# EAGLE board HW2_circuit (EAGLE 8.1.0)
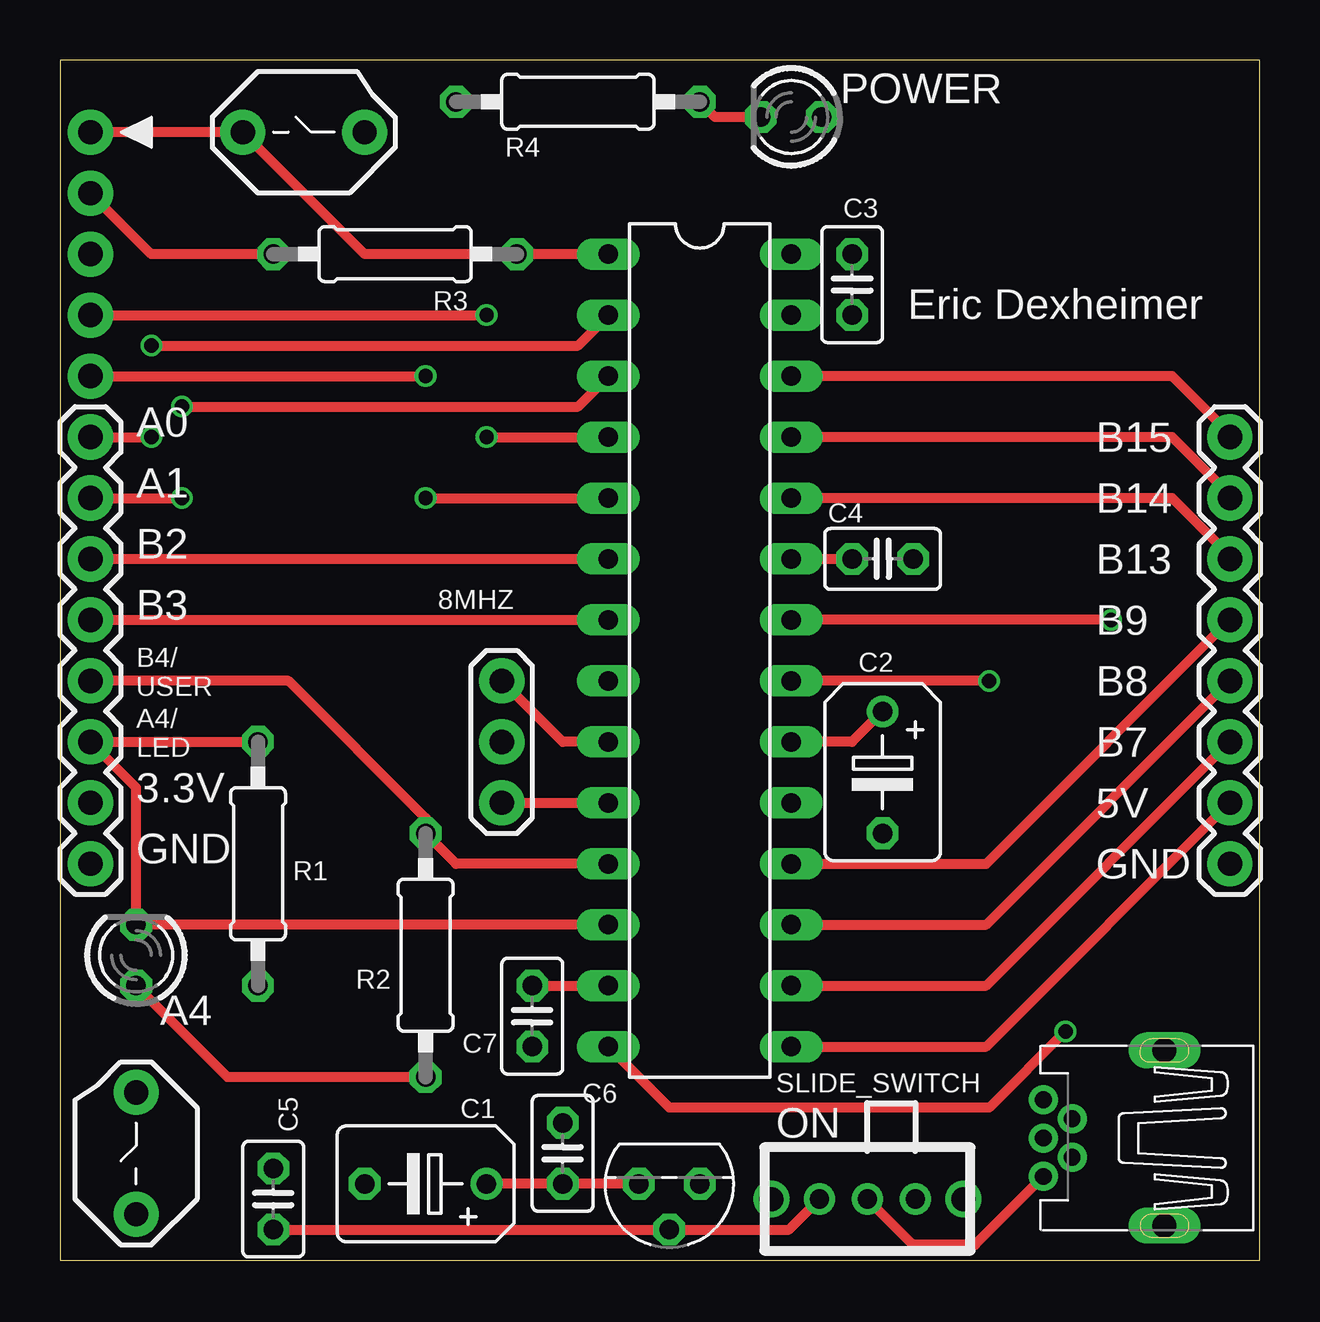
[diagram p0: board, top side]
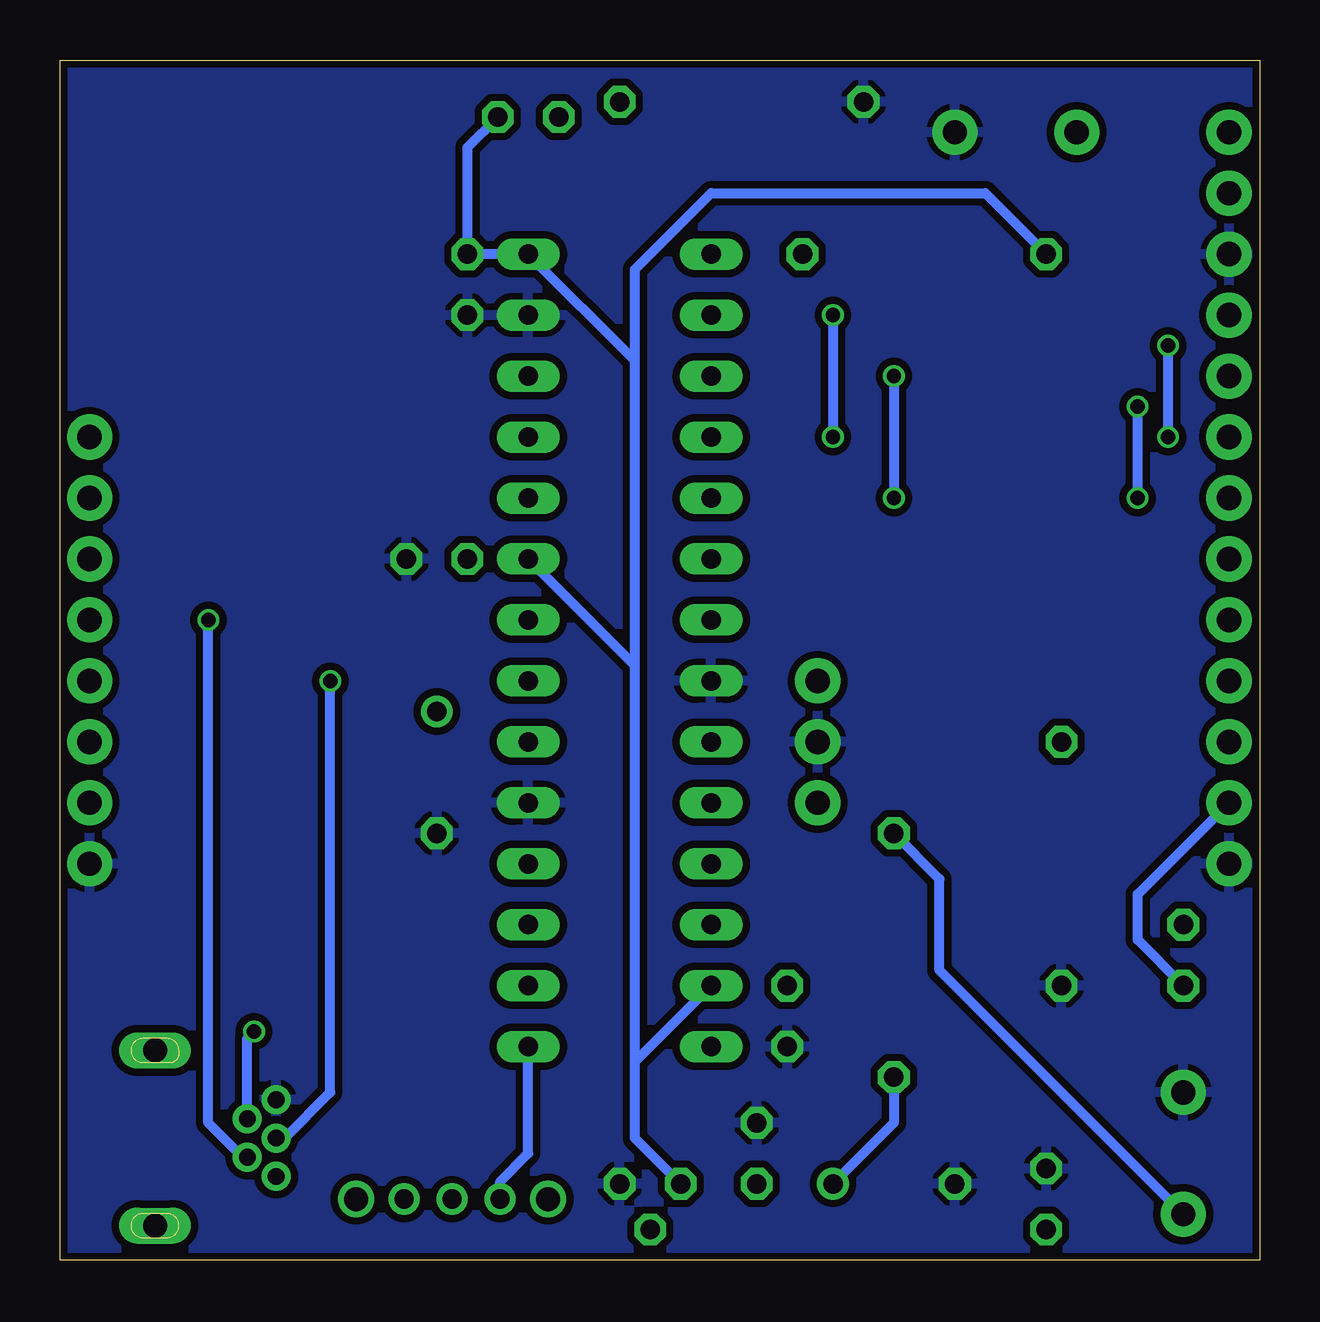
[diagram p1: board, bottom side, seen from below]

Size 50 x 50 mm. Coordinates in mm from the lower left corner, seen from the top.
Outline: 0,0 50,0 50,50 0,50 0,0
Copper layers (1*16): Top 0.035mm / dielectric 1.5mm / Bottom 0.035mm
Design rules "SeeedStudio_2layer_DRU_no_angle_20140221": minimum track width 6mil, minimum drill 12mil, track to track 6mil, track to pad 6mil, pad to pad 6mil, via to via 6mil, smd to smd 0mil, copper to edge 10mil, drill to drill 10mil, minimum pad ring 10mil, minimum via ring 6mil, stop-mask expansion 2mil, vias tented up to drill 100mil, thermal gap 10mil

## Footprints (pad centres in the part's own frame; a part is rotated, then mirrored left to right if it is on the bottom)
OSCILLATOR = drill 1.016 pad 1.88: 1 -2.54,0; 2 0,0; 3 2.54,0
LED3MM = drill 0.813 octagon: A -1.27,0; K 1.27,0
B45181B = drill 0.813: + -2.54,0 | drill 0.813 octagon: - 2.54,0
C025-025X050 = drill 0.813 octagon: 1 -1.27,0; 2 1.27,0
1X08 = drill 1.016 pad 1.88: 1 0,0; 2 2.54,0; 3 5.08,0; 4 7.62,0; 5 10.16,0; 6 12.7,0; 7 15.24,0; 8 17.78,0
SLIDE_SWITCH = drill 0.8: 2 2,0; 3 0,0; 4 -2,0 | drill 1: P$1 4,0; P$2 -4,0
0207/10 = drill 0.813 octagon: 1 -5.08,0; 2 5.08,0
DIL28-3 = drill 0.813 long: 1 -16.51,-3.81; 2 -13.97,-3.81; 3 -11.43,-3.81; 4 -8.89,-3.81; 5 -6.35,-3.81; 6 -3.81,-3.81; 7 -1.27,-3.81; 8 1.27,-3.81; 9 3.81,-3.81; 10 6.35,-3.81; 11 8.89,-3.81; 12 11.43,-3.81; 13 13.97,-3.81; 14 16.51,-3.81; 15 16.51,3.81; 16 13.97,3.81; 17 11.43,3.81; 18 8.89,3.81; 19 6.35,3.81; 20 3.81,3.81; 21 1.27,3.81; 22 -1.27,3.81; 23 -3.81,3.81; 24 -6.35,3.81; 25 -8.89,3.81; 26 -11.43,3.81; 27 -13.97,3.81; 28 -16.51,3.81
TO92 = drill 0.813 octagon: 1 -1.27,0; 2 0,1.905; 3 1.27,0
BUTTON = drill 1.016 pad 1.88: 1 -2.54,0; 3 2.54,0
PICKIT32 = drill 1.016 pad 1.88: 1 -5.08,0; 2 -2.54,0; 3 0,0; 4 2.54,0; 5 5.08,0
32005-601 = drill 0.7 pad 1.016: 1 2.825,1.6; 2 1.625,0.8; 3 2.825,0; 4 1.625,-0.8; 5 2.825,-1.6 | drill 1 pad 1.422 long: M1 -2.225,3.65; M2 -2.225,-3.65

## Placement (x,y rotation side)
8MHZ  RESONATOR  [OSCILLATOR]  18.41,21.59 90 top
A4  A4/LED  [LED3MM]  3.17,12.7 90 top
C1  10 uF  [B45181B]  15.24,3.17 180 top
C2  10 uF  [B45181B]  34.29,20.32 270 top
C3  0.1 uF  [C025-025X050]  33.02,40.64 270 top
C4  0.1 uF  [C025-025X050]  34.29,29.21 0 top
C5  0.1 uF  [C025-025X050]  8.89,2.54 90 top
C6  0.1 uF  [C025-025X050]  20.95,4.45 90 top
C7  0.1 uF  [C025-025X050]  19.68,10.16 270 top
J2  LEFT  [1X08]  1.27,16.51 90 top
J3  RIGHT  [1X08]  48.77,16.51 90 top
ON  SLIDE_SWITCH  [SLIDE_SWITCH]  33.66,2.54 0 bottom
POWER  RED  [LED3MM]  30.48,47.62 180 top
R1  330  [0207/10]  8.26,16.51 90 top
R2  10k  [0207/10]  15.24,12.7 270 top
R3  10k  [0207/10]  13.97,41.91 180 top
R4  330  [0207/10]  21.59,48.26 0 top
U$1  PIC32  [DIL28-3]  26.67,25.4 270 top
U$4  MCP1702  [TO92]  25.4,3.17 180 top
U$5  USER  [BUTTON]  3.17,4.45 90 top
U$6  RESET  [BUTTON]  10.16,46.99 0 top
U$7  PICKIT3  [PICKIT32]  1.27,41.91 270 top
X1  MINI-USB_SHIELD5P2-32005-601  [32005-601]  43.81,5.08 180 top

## Library data of the parts
8MHZ A4 C1-C7 ON POWER R1-R4 U$1 U$4-U$7 = ME433
J2 J3 = ME433; PROD_ID: CONN-08438
X1 = ME433; OC_FARNELL: unknown; OC_NEWARK: unknown

## Nets
+3V3: A4.A C1.+ C3.1 C4.1 C6.1 C7.1 J2.2 POWER.A R2.2 R3.2 U$1.13 U$1.23 U$1.28 U$4.3 U$7.2
+5V: C5.1 J3.2 ON.2 U$1.15 U$4.2
A0: J2.8 U$1.2
A1: J2.7 U$1.3
A4/LED: A4.K J2.3 R1.2 U$1.12
B2: J2.6 U$1.6
B3: J2.5 U$1.7
B4/USER: J2.4 R2.1 U$1.11 U$5.1
B7: J3.3 U$1.16
B8: J3.4 U$1.17
B9: J3.5 U$1.18
B13: J3.6 U$1.24
B14: J3.7 U$1.25
B15: J3.8 U$1.26
D+: U$1.21 X1.3
D-: U$1.22 X1.2
GND: 8MHZ.2 C1.- C2.- C3.2 C4.2 C5.2 C6.2 C7.2 J2.1 J3.1 R1.1 R4.1 U$1.8 U$1.19 U$1.27 U$4.1 U$5.3 U$6.3 U$7.3 X1.5
MCLR: R3.1 U$1.1 U$6.1 U$7.1
N$1: C2.+ U$1.20
N$3: POWER.K R4.2
OSC1: 8MHZ.3 U$1.9
OSC2: 8MHZ.1 U$1.10
PGEC1: U$1.5 U$7.5
PGED1: U$1.4 U$7.4
USBID: U$1.14 X1.4
VBUS: ON.3 X1.1

## Tracks (layer width: path | path; a pad name or v marks a point on that pad's centre or on a via)
+3V3
  Top 0.406: U$4.3 C6.1 C1.+ | U$1.23 C4.1 | C7.1 U$1.13 | R2.2 6.99,7.62 A4.A | R3.2 3.81,41.91 U$7.2
  Bottom 0.406: U$4.3 26.04,5.08 26.04,8.26 | 26.04,8.26 U$1.13 | 26.04,8.26 26.04,24.77 | 26.04,24.77 U$1.23 | R2.2 15.24,5.71 C1.+ | A4.A 5.08,13.34 5.08,15.24 J2.2 | 26.04,24.77 26.04,37.47 | 26.04,37.47 U$1.28 C3.1 33.02,46.35 POWER.A | 26.04,37.47 26.04,41.27 22.86,44.45 11.43,44.45 R3.2
+5V
  Top 0.406: C5.1 U$4.2 30.39,1.27 ON.2 | U$1.15 38.61,8.89 J3.2
  Bottom 0.406: U$1.15 30.48,4.45 31.66,3.27 ON.2
A0  (via drill 0.6)
  Top 0.406: J2.8 v3.81,34.29 | v3.81,38.1 21.59,38.1 U$1.2
  Bottom 0.406: v3.81,34.29 v3.81,38.1
A1  (via drill 0.6)
  Top 0.406: J2.7 v5.08,31.75 | v5.08,35.56 21.59,35.56 U$1.3
  Bottom 0.406: v5.08,31.75 v5.08,35.56
A4/LED
  Top 0.406: U$1.12 A4.K 3.17,19.68 J2.3 R1.2
B2
  Top 0.406: J2.6 U$1.6
B3
  Top 0.406: J2.5 U$1.7
B4/USER
  Top 0.406: U$1.11 16.51,16.51 R2.1 15.24,18.41 9.53,24.13 J2.4
  Bottom 0.406: U$5.1 13.34,12.06 13.34,15.88 R2.1
B7
  Top 0.406: U$1.16 38.61,11.43 J3.3
B8
  Top 0.406: U$1.17 38.61,13.97 J3.4
B9
  Top 0.406: U$1.18 38.61,16.51 J3.5
B13
  Top 0.406: J3.6 48.77,29.34 46.35,31.75 U$1.24
B14
  Top 0.406: J3.7 48.77,31.88 46.35,34.29 U$1.25
B15
  Top 0.406: J3.8 48.77,34.42 46.35,36.83 U$1.26
D+  (via drill 0.6)
  Top 0.406: v38.73,24.13 U$1.21
  Bottom 0.406: X1.3 40.64,5.08 38.73,6.99 v38.73,24.13
D-  (via drill 0.6)
  Top 0.406: v43.81,26.67 U$1.22
  Bottom 0.406: X1.2 42.38,4.28 43.81,5.71 v43.81,26.67
GND
  pour Bottom (isolate 0.305): -2.54,49.53 -2.54,-1.27 52.07,-1.27 52.07,50.8 -2.54,50.8
MCLR
  Top 0.406: U$7.1 U$6.1 12.7,41.91 R3.1 U$1.1
N$1
  Top 0.406: C2.+ 33.02,21.59 U$1.20
N$3
  Top 0.406: POWER.K 27.3,47.62 R4.2
OSC1
  Top 0.406: U$1.9 20.95,21.59 8MHZ.3
OSC2
  Top 0.406: 8MHZ.1 U$1.10
PGEC1  (via drill 0.6)
  Top 0.406: U$7.5 v15.24,36.83 | v15.24,31.75 U$1.5
  Bottom 0.406: v15.24,36.83 v15.24,31.75
PGED1  (via drill 0.6)
  Top 0.406: U$7.4 v17.78,39.37 | v17.78,34.29 U$1.4
  Bottom 0.406: v17.78,39.37 v17.78,34.29
USBID  (via drill 0.6)
  Top 0.406: v41.91,9.53 38.73,6.35 25.4,6.35 U$1.14
  Bottom 0.406: X1.4 42.19,9.24 v41.91,9.53
VBUS
  Top 0.406: X1.1 38.15,0.64 35.56,0.64 ON.3

## Text on the board
tPlace: Eric Dexheimer | A0 | B15 | A1 | B14 | B2 | B13 | B3 | B9 | B4/ / USER | B8 | A4/ / LED | B7 | 3.3V | 5V | GND | GND